# EAGLE board MINI_SAM_D51_001 (EAGLE 9.0.0)
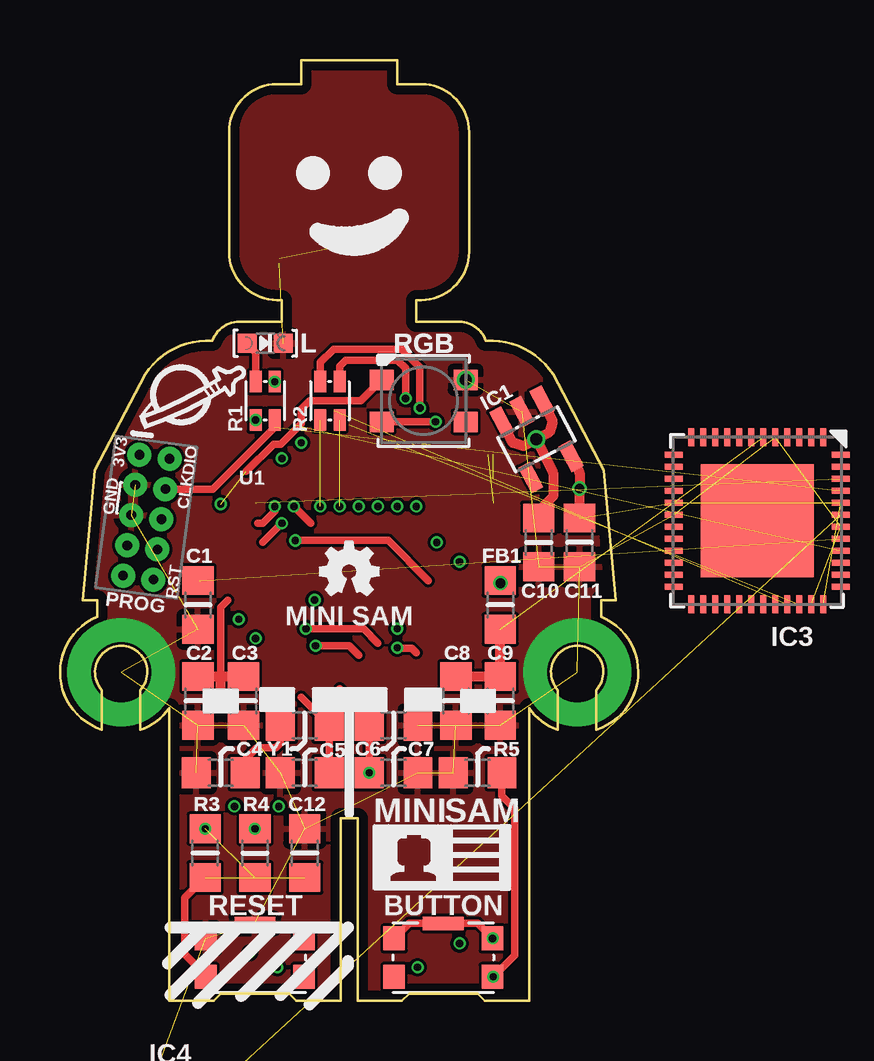
[diagram p0: board, top side]
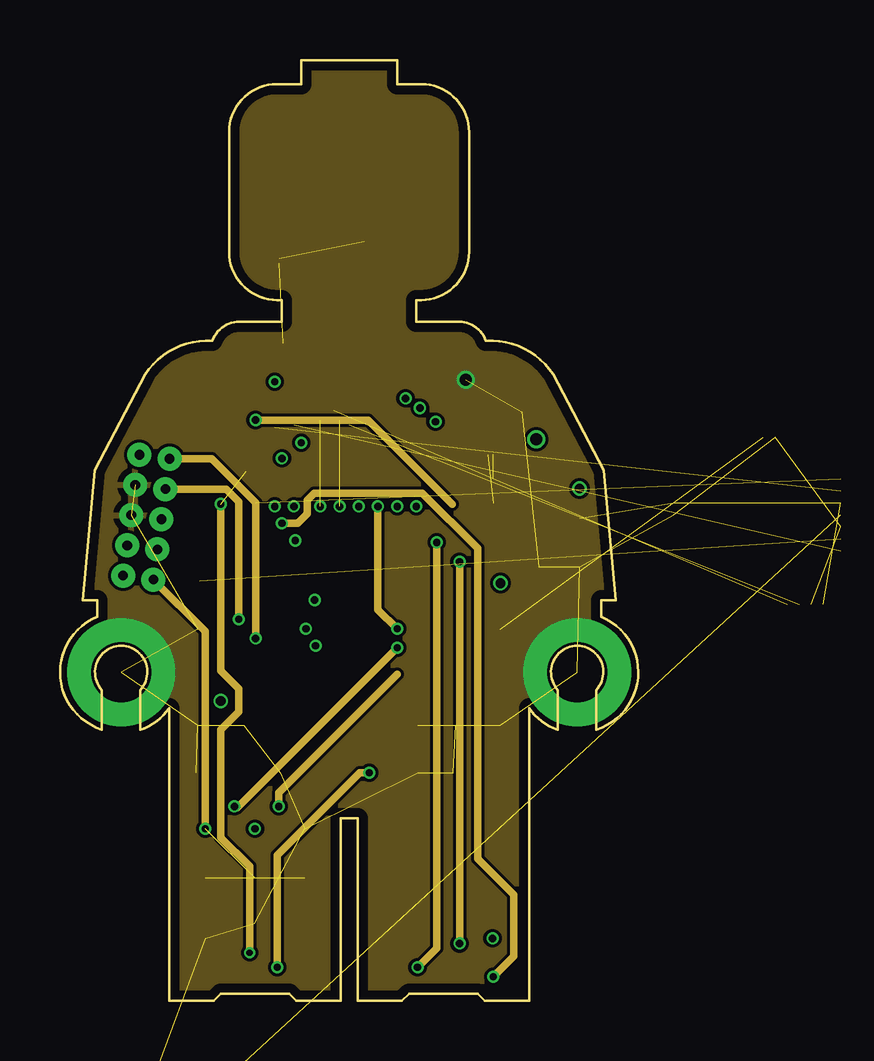
[diagram p1: board, inner layer Route2]
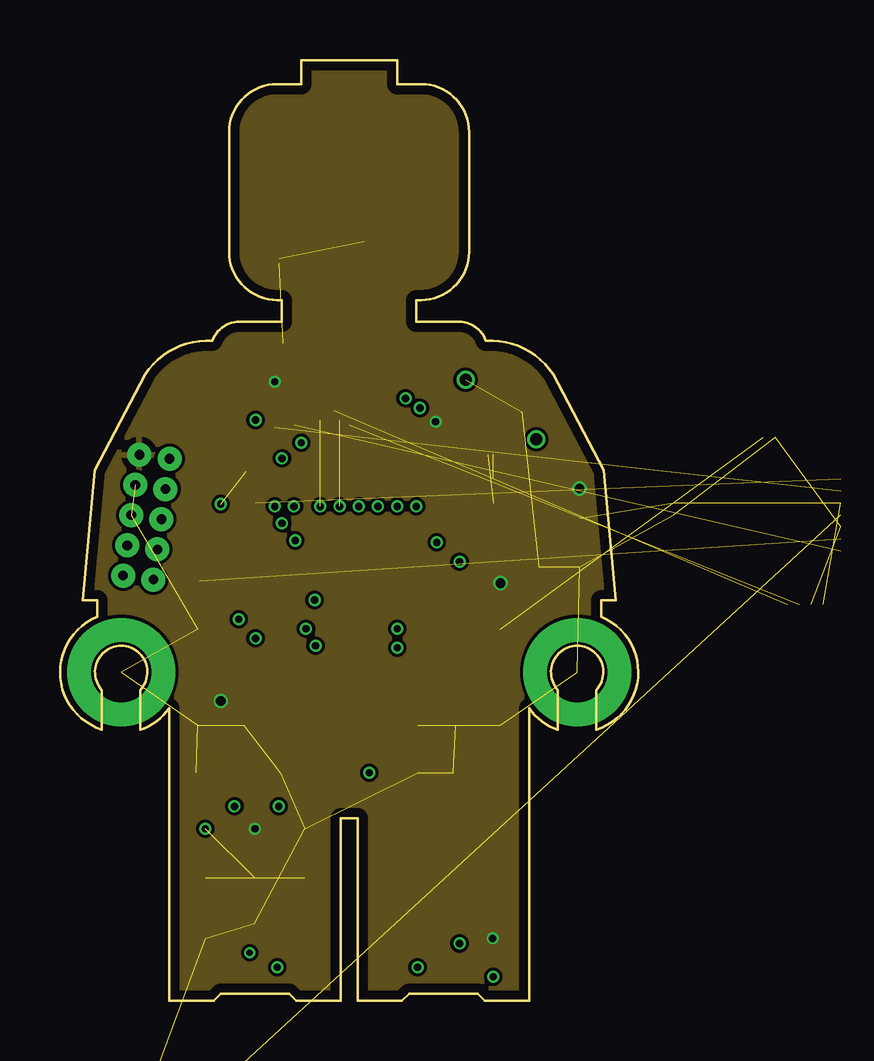
[diagram p2: board, inner layer Route15]
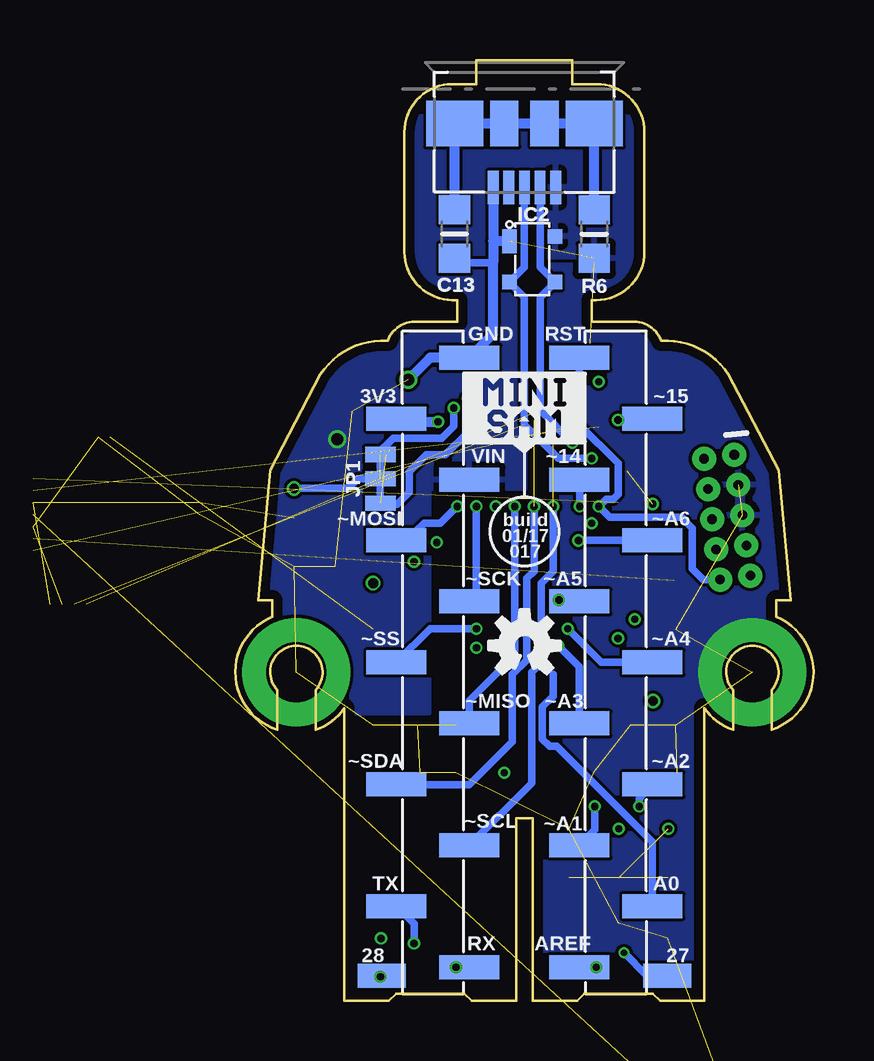
[diagram p3: board, bottom side, seen from below]

Size 24.1 x 39.2 mm. Coordinates in mm from the lower left corner, seen from the top.
Outline: 10.05,39.2 14.05,39.2 14.05,38.2 15.05,38.2 arc-90 17.05,36.2 17.05,31.2 arc-90 15.05,29.2 14.85,29.2 14.85,28.3 16.73,28.3 arc-63 17.75,27.5 arc-60 20.55,26.1 22.65,22.1 23.15,16.7 22.55,16.7 22.55,16 arc-140 22.35,11.3 22.35,12.95 arc132 21.55,14.8 arc132 20.75,12.95 20.75,11.3 arc-40 19.55,12.2 19.55,0 17.7,0 17.4,0.3 14.55,0.3 14.25,0 12.4,0 12.4,7.6 11.7,7.6 11.7,0 9.85,0 9.55,0.3 6.7,0.3 6.4,0 4.55,0 4.55,12.2 arc-40 3.35,11.3 3.35,12.95 arc132 2.55,14.8 arc132 1.75,12.95 1.75,11.3 arc-140 1.55,16 1.55,16.7 0.95,16.7 1.45,22.1 3.55,26.1 arc-60 6.35,27.5 arc-63 7.37,28.3 9.25,28.3 9.25,29.2 9.05,29.2 arc-90 7.05,31.2 7.05,36.2 arc-90 9.05,38.2 10.05,38.2 10.05,39.2
Copper layers (1*2*15*16): Top 0.035559375mm / dielectric 0.17018125mm / Route2 0.01778125mm / dielectric 47mil / Route15 0.01778125mm / dielectric 0.17018125mm / Bottom 0.035559375mm
Design rules "OSHPark-4layer *": minimum track width 5mil, minimum drill 10mil, track to track 5mil, track to pad 5mil, pad to pad 5mil, via to via 5mil, smd to smd 5mil, copper to edge 15mil, drill to drill 6mil, minimum pad ring 4mil, minimum via ring 4mil, stop-mask expansion 2.5mil, vias tented up to drill 28mil, thermal gap 10mil

## Footprints (pad centres in the part's own frame; a part is rotated, then mirrored left to right if it is on the bottom)
_0805MP = smd 1.2 x 1.3: 1 -1.016,0; 2 1.016,0
SOT23-5 = smd 0.55 x 1.2: 1 -0.95,-1.3; 2 0,-1.3; 3 0.95,-1.3; 4 0.95,1.3; 5 -0.95,1.3
SOT143B_REFLOW = smd 1 x 0.6: P1 -0.75,-0.95 | smd 0.6 x 0.6: P2 0.95,-0.95; P$3 0.95,0.95; P$4 -0.95,0.95
TQFN48_7MM = smd 0.25 x 0.75: 1 -2.75,-3.475; 2 -2.25,-3.475; 3 -1.75,-3.475; 4 -1.25,-3.475; 5 -0.75,-3.475; 6 -0.25,-3.475; 7 0.25,-3.475; 8 0.75,-3.475; 9 1.25,-3.475; 10 1.75,-3.475; 11 2.25,-3.475; 12 2.75,-3.475; 25 2.75,3.475; 26 2.25,3.475; 27 1.75,3.475; 28 1.25,3.475; 29 0.75,3.475; 30 0.25,3.475; 31 -0.25,3.475; 32 -0.75,3.475; 33 -1.25,3.475; 34 -1.75,3.475; 35 -2.25,3.475; 36 -2.75,3.475 | smd 0.75 x 0.25: 13 3.475,-2.75; 14 3.475,-2.25; 15 3.475,-1.75; 16 3.475,-1.25; 17 3.475,-0.75; 18 3.475,-0.25; 19 3.475,0.25; 20 3.475,0.75; 21 3.475,1.25; 22 3.475,1.75; 23 3.475,2.25; 24 3.475,2.75; 37 -3.475,2.75; 38 -3.475,2.25; 39 -3.475,1.75; 40 -3.475,1.25; 41 -3.475,0.75; 42 -3.475,0.25; 43 -3.475,-0.25; 44 -3.475,-0.75; 45 -3.475,-1.25; 46 -3.475,-1.75; 47 -3.475,-2.25; 48 -3.475,-2.75 | smd 4.7 x 4.7: THERMAL 0,0
MOLEX_47346-1001 = smd 0.45 x 1.38: P1 1.3,-2.66; P2 0.65,-2.66; P3 0,-2.66; P4 -0.65,-2.66; P5 -1.3,-2.66 | smd 2.375 x 1.9: PAD1 -2.913,0; PAD4 2.913,0 | smd 1.175 x 1.9: PAD2 -0.838,0; PAD3 0.838,0
2X5-PTH-1.27MM = drill 0.4 pad 1: 1 -2.54,-0.635; 2 -2.54,0.635; 3 -1.27,-0.635; 4 -1.27,0.635; 5 0,-0.635; 6 0,0.635; 7 1.27,-0.635; 8 1.27,0.635; 9 2.54,-0.635; 10 2.54,0.635
1X11_SMT = smd 1 x 2.5: 1 -12.7,1.52; 2 -10.16,-1.52; 3 -7.62,1.52; 4 -5.08,-1.52; 5 -2.54,1.52; 6 0,-1.52; 7 2.54,1.52; 8 5.08,-1.52; 9 7.62,1.52; 10 10.16,-1.52; 11 12.7,1.52
SMD2MMX1MM = smd 1 x 2: P$1 0,0
SMT-JUMPER_3_2-NC_TRACE_NO-SILK = smd 0.635 x 1.27: 1 -1.016,0; 2 0,0; 3 1.016,0
CHIPLED_0603_NOOUTLINE = smd 0.8 x 0.8: A 0,-0.75; C 0,0.75
RESISTOR_ARRAY_0606 = smd 0.5 x 0.9: 1 -0.4,-0.8; 2 -0.4,0.8; 3 0.4,-0.8; 4 0.4,0.8
LED3535 = smd 1 x 0.85: 1 -1.75,0.875; 2 -1.75,-0.875; 3 1.75,-0.875; 4 1.75,0.875
KMS_SWITCH = smd 0.9 x 1: 1 -2.05,-0.8; 2 -2.05,0.8; 4 2.05,0.8; 5 2.05,-0.8 | smd 1.7 x 0.55: 3 0,1.425

## Placement (x,y rotation side)
C1  1µF  [_0805MP]  5.75,16.5 270 top
C2  10µF  [_0805MP]  5.75,12.5 270 top
C3  0.1µF  [_0805MP]  7.65,12.5 270 top
C4  7pF  [_0805MP]  6.7,9.5 0 top
C5  7pF  [_0805MP]  10.2,9.5 0 top
C6  1µF  [_0805MP]  13.9,11.48 0 top
C7  0.1µF  [_0805MP]  13.9,9.5 0 top
C8  0.1µF  [_0805MP]  16.5,12.5 270 top
C9  10µF  [_0805MP]  18.35,12.5 270 top
C10  1µF  [_0805MP]  19.95,19.1 90 top
C11  1µF  [_0805MP]  21.65,19.1 270 top
C12  0.1µF  [_0805MP]  10.2,6.15 270 top
C13  4.7nF  [_0805MP]  14.96,31.95 270 bottom
FB1  [_0805MP]  18.35,16.5 270 top
IC1  AP2112K-3.3V  [SOT23-5]  19.85,23.4 207.7 top
IC2  PRTR5V0U2X  [SOT143B_REFLOW]  11.72,30.9 270 bottom
IC3  ATSAMD51G_TQFN48  [TQFN48_7MM]  29.05,20 180 top
IC4  ATSAMD51G_TQFN48  [TQFN48_7MM]  6.05,-7 0 top  (outside the outline)
J1  MOLEX_47346-100147346  [MOLEX_47346-1001]  12.05,36.55 0 bottom
J2  CORTEX_DEBUG_PTH  [2X5-PTH-1.27MM]  3.6,20.15 262.4 top
J3  [1X11_SMT]  8.24,14.1 90 bottom
J4  [1X11_SMT]  15.86,14.1 270 bottom
J5  FR11_PAD2MMX1MM  [SMD2MMX1MM]  18,1.05 90 bottom
J6  FR11_PAD2MMX1MM  [SMD2MMX1MM]  6.1,1.05 270 bottom
JP1  JUMPER-SMT_3_2-NC_TRACE_NO-SILK  [SMT-JUMPER_3_2-NC_TRACE_NO-SILK]  18.05,21.75 270 bottom
L  APTD1608LSECK/J3-PF  [CHIPLED_0603_NOOUTLINE]  8.55,27.4 270 top
R1  1K  [RESISTOR_ARRAY_0606]  8.55,25 180 top
R2  4.7K  [RESISTOR_ARRAY_0606]  11.25,25 180 top
R3  330Ohm  [_0805MP]  6.05,6.15 270 top
R4  10K  [_0805MP]  8.12,6.15 90 top
R5  10K  [_0805MP]  17.4,9.5 0 top
R6  1M  [_0805MP]  9.14,31.95 90 bottom
RGB  WS2812B3535  [LED3535]  15.15,25 0 top
SW1  KMS233GLFG  [KMS_SWITCH]  8.12,1.8 0 top
SW2  KMS233GLFG  [KMS_SWITCH]  15.97,1.8 0 top
U$1  [OSHW-LOGO-MINI]  12.05,17.9 0 top
U$3  [OSHW-LOGO-S]  12.05,14.8 0 bottom
Y1  32.768kHz 7pF  [_0805MP]  10.2,11.48 0 top

## Library data of the parts
C1-C13 FB1 IC3 IC4 L R3-R6 = microbuilder
IC1 = SparkFun-PowerIC; PROD_ID: VREG-12457
IC2 J1 J5 J6 R1 R2 SW1 SW2 Y1 = Shockley_Custom
J2 = SparkFun-Connectors
J3 J4 = pinhead+
JP1 = SparkFun-Jumpers
RGB = adafruit
U$1 U$3 = SparkFun-Aesthetics

## Nets
14: J3.9
15: J3.10 R1.4
27: J6.P$1 RGB.1
27_OUT: RGB.3
28: J5.P$1 R5.2 SW2.5
!RESET: IC3.40 J2.10 J3.11 R3.1 R4.1
A0: J3.2
A1: J3.3
A2: J3.4
A3: J3.5
A4: J3.6
A5: J3.7
A6: J3.8
AREF: C6.1 C7.1 J3.1
GND: C1.2 C2.2 C3.2 C4.1 C5.1 C6.2 C7.2 C8.2 C9.2 C10.1 C11.2 C12.1 C13.2 IC1.2 IC2.P1 IC3.5 IC3.18 IC3.35 IC3.42 IC4.18 IC4.35 IC4.42 IC4.THERMAL J1.P5 J2.3 J2.5 J4.1 L.C R5.1 R6.1 RGB.4 SW1.2 SW1.3
GNDA: IC4.5
LED: L.A R1.3
MISO: J4.7
MOSI: J4.4
N$1: C4.2 Y1.1
N$2: C13.1 J1.PAD1 J1.PAD2 J1.PAD3 J1.PAD4 R6.2
N$3: JP1.1 R2.1
N$4: C12.2 R3.2 SW1.1
N$5: C5.2 Y1.2
N$6: JP1.3 R2.3
N$9: C1.1 IC3.41
RX: J4.11
SCK: J4.5
SCL: J4.9 R2.4
SDA: J4.8 R2.2
SS: J4.6
SWCLK: IC3.45 J2.4 R1.2
SWDIO: IC3.46 J2.2
TP: IC3.THERMAL
TX: J4.10
USBD+ [USB_DATA]: IC2.P2 IC3.34 J1.P3
USBD- [USB_DATA]: IC2.P$3 IC3.33 J1.P2
VDD: C2.1 C3.1 C11.1 FB1.1 IC1.5 IC3.17 IC3.36 IC3.44 J2.1 J4.2 JP1.2 R1.1 R4.2 RGB.2 SW2.2 SW2.3 SW2.4
VDDA: IC4.6
VDDANA: C8.1 C9.1 FB1.2 IC3.6
VDDCORE: IC4.41
VDDIO: IC4.17 IC4.36 IC4.44
VIN: C10.2 IC1.1 IC1.3 IC2.P$4 J1.P1 J4.3
VSW: IC3.43 IC4.43

## Tracks (layer width: path | path; a pad name or v marks a point on that pad's centre or on a via)
14  (via drill 0.3)
  Top 0.305: 10.45,19.9 v9.75,20.6
  Bottom 0.254: J3.9
  Bottom 0.305: v9.75,20.6 J3.9
15  (via drill 0.3)
  Route2 0.305: R1.4 12.84,24.2 16.34,20.7
  Bottom 0.305: R1.4 6.72,24.2 J3.10
  other vias: 8.15,24.2
27  (via drill 0.25, 0.3)  (1 unrouted)
  Top 0.305: RGB.1 12.52,25 10.4,25 10.05,24.65 10.05,24.05 9.2,23.2 8.9,23.2 7.75,22.06
  Route2 0.305: v6.7,20.7 6.7,13.75 7.45,13 7.45,12.05 6.7,11.3 6.7,6.8 7.9,5.6 v7.9,2
  Bottom 0.305: J6.P$1 6.95,1.05 v7.9,2
28  (via drill 0.3)
  Top 0.254: v18.05,1 SW2.5
  Top 0.305: 8.45,19.1 v9.25,19.9 | R5.2 18.41,8.53 18.95,8 18.95,1.9 v18.05,1
  Route2 0.305: v18.05,1 18.9,1.85 18.9,4.42 17.4,5.92 17.4,18.85 15.1,21.15 10.6,21.15 10.3,20.85 10.3,20.3 9.9,19.9 v9.25,19.9
  Bottom 0.254: J5.P$1 v18.05,1
!RESET  (via drill 0.3)  (2 unrouted)
  Top 0.305: 8.25,19.9 8.45,19.9 8.95,20.4 v8.95,20.6
  Route2 0.305: J2.10 6.05,15.39 R3.1
  Bottom 0.305: J3.11 9.76,24.01 8.15,22.4 8.15,21.1 8.35,20.9 8.65,20.9 v8.95,20.6 8.5,20.15 5.5,20.15 5.05,19.7 5.05,18 4.6,17.55 J2.10
  other vias: 6.05,7.17
A0
  Bottom 0.305: 10.85,13.61 10.85,12.7 11.3,12.25 11.3,10.9 11,10.6 10.7,10.6 6.72,6.62 J3.2
A1  (via drill 0.3)
  Route2 0.254: 14.05,13.61 14.05,13.6
  Route2 0.305: v9.12,8.1 9.12,8.68 14.05,13.61
  Bottom 0.305: v9.12,8.1 9.12,7.12 J3.3
A2  (via drill 0.3)
  Top 0.254: v14.05,14.7 v14.05,14.71
  Top 0.305: 14.85,14.5 14.65,14.7 v14.05,14.7
  Route2 0.305: v7.27,8.1 7.39,8.05 v14.05,14.71
  Bottom 0.304: v7.27,8.1 7.27,8.42 J3.4
A3  (via drill 0.3)
  Top 0.305: v10.65,14.8 12.05,14.8 12.45,14.4
  Bottom 0.305: v10.65,14.8 9.76,13.91 J3.5
A4  (via drill 0.3)
  Top 0.305: v10.25,15.5 12.65,15.5 13.25,14.9
  Bottom 0.305: v10.25,15.5 8.85,14.1 J3.6
A5  (via drill 0.3)
  Bottom 0.305: J3.7 9.81,16.69 v10.61,16.7
A6  (via drill 0.3)
  Top 0.305: 15.35,17.5 13.67,19.18 v9.8,19.18
  Bottom 0.305: v9.8,19.18 J3.8
AREF  (via drill 0.3)
  Top 0.305: 11.65,13 12.88,11.77 C6.1 C7.1
  Route2 0.305: v9.06,1.4 9.06,6.06 12.5,9.5 C7.1
  Bottom 0.254: J3.1 v9.06,1.4
  other vias: 12.88,9.5
GND  (via drill 0.5, 2.5 pad 4.5)  (30 unrouted)
  Bottom 0.305: 13.35,30.75 14.65,30.75 C13.2 | 9.14,30.73 R6.1
  Bottom 0.406: J1.P5 13.35,31.65 | 13.35,31.65 13.35,30.75 13.35,27.79 J4.1 15.97,26.8 RGB.4 | IC2.P1 13.35,31.65
  other vias: 2.55,13.7 16.9,25.88 21.55,13.7
  pour Top: 4.55,0 19.55,0 19.55,12 21.05,12 21.05,14 22.05,14 22.05,12 24.05,12 24.05,40 0.05,40 0.05,12 2.05,12 2.05,14 3.05,14 3.05,12 4.55,12
  pour Route2: 4.55,0 19.55,0 19.55,12 21.05,12 21.05,14 22.05,14 22.05,12 24.05,12 24.05,40 0.05,40 0.05,12 2.05,12 2.05,14 3.05,14 3.05,12 4.55,12
  pour Bottom (rank 2): 9.75,40 9.75,31 12.05,31 12.05,21.35 16.05,21.35 16.05,12 19.55,12 19.55,0 4.55,0 4.55,12 3.05,12 3.05,14 2.05,14 2.05,12 0.05,12 0.05,40
LED
  Top 0.305: R1.3 8.15,27 L.A
MISO  (via drill 0.3)
  Bottom 0.305: J4.7 14.34,12.51 12.45,14.4 v12.45,20.6
MOSI  (via drill 0.3)
  Bottom 0.254: 16.47,19.18 16.95,19.18 J4.4
  Bottom 0.305: 16.95,19.18 arc90 16.63,19.5 16.23,19.9 15.55,19.9 v14.85,20.6
N$1
  Top 0.305: 9.25,11.55 Y1.1 9.18,10.73 9,10.55 8.2,10.55 7.76,10.12 C4.2
N$2
  Bottom 0.406: R6.2 J1.PAD4 J1.PAD3 J1.PAD2 J1.PAD1 C13.1
N$3  (via drill 0.3)  (1 unrouted)
  Top 0.305: v14.4,25.1 14.4,26.35 14.05,26.7 11.9,26.7 11.65,26.45 R2.1
  Bottom 0.305: v14.4,25.1 14.4,23.7 15.35,22.75 16.15,22.75 16.85,22.05 16.85,21.2 17.35,20.7 18.05,20.7 18.05,21.75
N$4  (1 unrouted)
  Top 0.254: 6.07,1.07 SW1.1
  Top 0.305: R3.2 5.2,4.28 5.2,1.95 6.07,1.07
N$5
  Top 0.305: 10.05,12.65 Y1.2 C5.2
N$6  (via drill 0.3)  (1 unrouted)
  Top 0.305: R2.3 10.85,26.6 11.4,27.15 14.25,27.15 15,26.4 v15,24.7
  Bottom 0.305: v15,24.7 15,23.95 15.5,23.45 17.51,23.45 18.2,22.77 | 17.83,22.75 18.2,22.77 | 18.2,22.77 18.05,22.77
N$9  (1 unrouted)
  Top 0.254: 5.81,17.5 C1.1
RX  (via drill 0.3)
  Route2 0.305: v14.9,1.4 15.7,2.2 v15.7,19.1
  Bottom 0.254: J4.11 v14.9,1.4
SCK  (via drill 0.3)
  Bottom 0.254: 14.05,17.12 J4.5
  Bottom 0.305: v14.05,20.6 14.05,17.12
SCL  (via drill 0.3)  (1 unrouted)
  Bottom 0.305: v10.85,20.6 10.85,17.9 11.35,17.4 11.35,14.1 11.75,13.7 11.75,9.07 J4.9
SDA  (via drill 0.3)  (1 unrouted)
  Bottom 0.254: 16.97,9.02 J4.8 17.55,9
  Bottom 0.305: v11.65,20.6 11.65,17.9 11.95,17.6 11.95,14.2 12.55,13.6 12.55,10.8 14.35,9 17.55,9
SS  (via drill 0.3)
  Route2 0.305: v13.25,20.6 13.25,16.3 v14.05,15.5
  Bottom 0.305: J4.6 15.97,15.5 v14.05,15.5
SWCLK  (via drill 0.3)  (1 unrouted)
  Top 0.305: J2.4 6.37,21.32 8.95,23.9 R1.2
  Route2 0.305: v7.45,15.9 7.45,20.8 6.92,21.32 J2.4
SWDIO  (via drill 0.3)  (1 unrouted)
  Route2 0.305: v8.15,15.1 8.15,20.75 6.31,22.58 J2.2
TX  (via drill 0.3)
  Route2 0.305: v16.65,18.3 v16.65,2.39
  Bottom 0.305: v16.65,2.39 16.65,3.21 J4.10
USBD+  (via drill 0.3)  (1 unrouted)
  Bottom 0.305: v9.25,22.6 10.65,22.6 12.05,24 12.05,29.32 IC2.P2 12.05,30.57 J1.P3
USBD-  (via drill 0.3)  (1 unrouted)
  Bottom 0.305: v10.05,23.25 11.4,24.6 11.4,29.32 IC2.P$3 11.4,30.57 J1.P2
VDD  (via drill 0.3, 0.4)  (3 unrouted)
  Top 0.254: v18.35,17.4 FB1.1 | C3.1 7.83,14 8.15,14
  Top 0.305: SW2.2 14.55,3.23 SW2.3 17.4,3.23 SW2.4 | 7,16.7 6.7,16.4 6.7,13.52 | RGB.2 v15.65,24.12
  Top 0.406: C2.1 6.7,13.52 | 6.7,13.52 C3.1 | v6.7,12.5 6.7,13.52 | C11.1 v21.65,21.35 21.65,22 IC1.5
  Bottom 0.305: 18.05,22.77 JP1.2 19,21.75 19.4,21.35 v21.65,21.35
  Bottom 0.406: J4.2 17.24,24.12 v15.65,24.12
  other vias: 8.12,7.17 18.02,2.6 8.95,25.8
  pour Route15: 4.55,0 19.55,0 19.55,12 21.05,12 21.05,14 22.05,14 22.05,12 24.05,12 24.05,40 0.05,40 0.05,12 2.05,12 2.05,14 3.05,14 3.05,12 4.55,12
VDDANA  (1 unrouted)
  Top 0.406: FB1.2 C9.1 C8.1 16.34,13.67
VDDIO  (2 unrouted)
VIN  (via drill 0.5)
  Top 0.406: IC1.3 18.84,23.27 19.32,23.12 v19.85,23.4 | IC1.1 20.53,24.15 20.38,23.68 v19.85,23.4 | 19.95,20.5 C10.2 19.95,20.42 20.55,21.02 20.55,22 v19.85,23.4
  pour Bottom: 9.75,40 9.75,31 12.05,31 12.05,21.35 16.05,21.35 16.05,12 21.05,12 21.05,14 22.05,14 22.05,12 24.05,12 24.05,40
VSW  (1 unrouted)

## Text on the board
tNames: R1 | R2 | 3V3 | DIO | U1 | GND | CLK | RST | PROG | MINI SAM | MINI | SAM | RESET | BUTTON
bNames: RST | GND | ~15 | 3V3 | ~14 | VIN | ~A6 | ~MOSI | build / 01/17 / 017 | ~A5 | ~SCK | ~A4 | ~SS | ~A3 | ~MISO | ~A2 | ~SDA | ~A1 | ~SCL | A0 | TX | 27 | AREF | RX | 28
_tNames: L | L | RGB | RGB | IC1 | IC1 | C1 | C1 | FB1 | FB1 | C10 | C10 | C11 | C11 | C2 | C2 | C3 | C3 | C8 | C8 | C9 | C9 | Y1 | Y1 | C6 | C6 | R5 | R5 | C4 | C4 | C5 | C5 | C7 | C7 | R3 | R3 | R4 | R4 | C12 | C12
_bNames: IC2 | IC2 | R6 | R6 | C13 | C13 | JP1 | JP1